# Altium PCB FPv0.13.PcbDoc (part 1 of 2)
Units mm, origin at the board's own origin, x right, y up, seen from the top; angles counter-clockwise.
Board outline 81.28 x 53.34 mm, 4 copper layers (Top Layer, GROUND PLANE, MidLayer1, Bottom Layer); 86 components, 142 nets, 542 pads, 250 vias.
Unrouted connection lines stored in the file: 1.
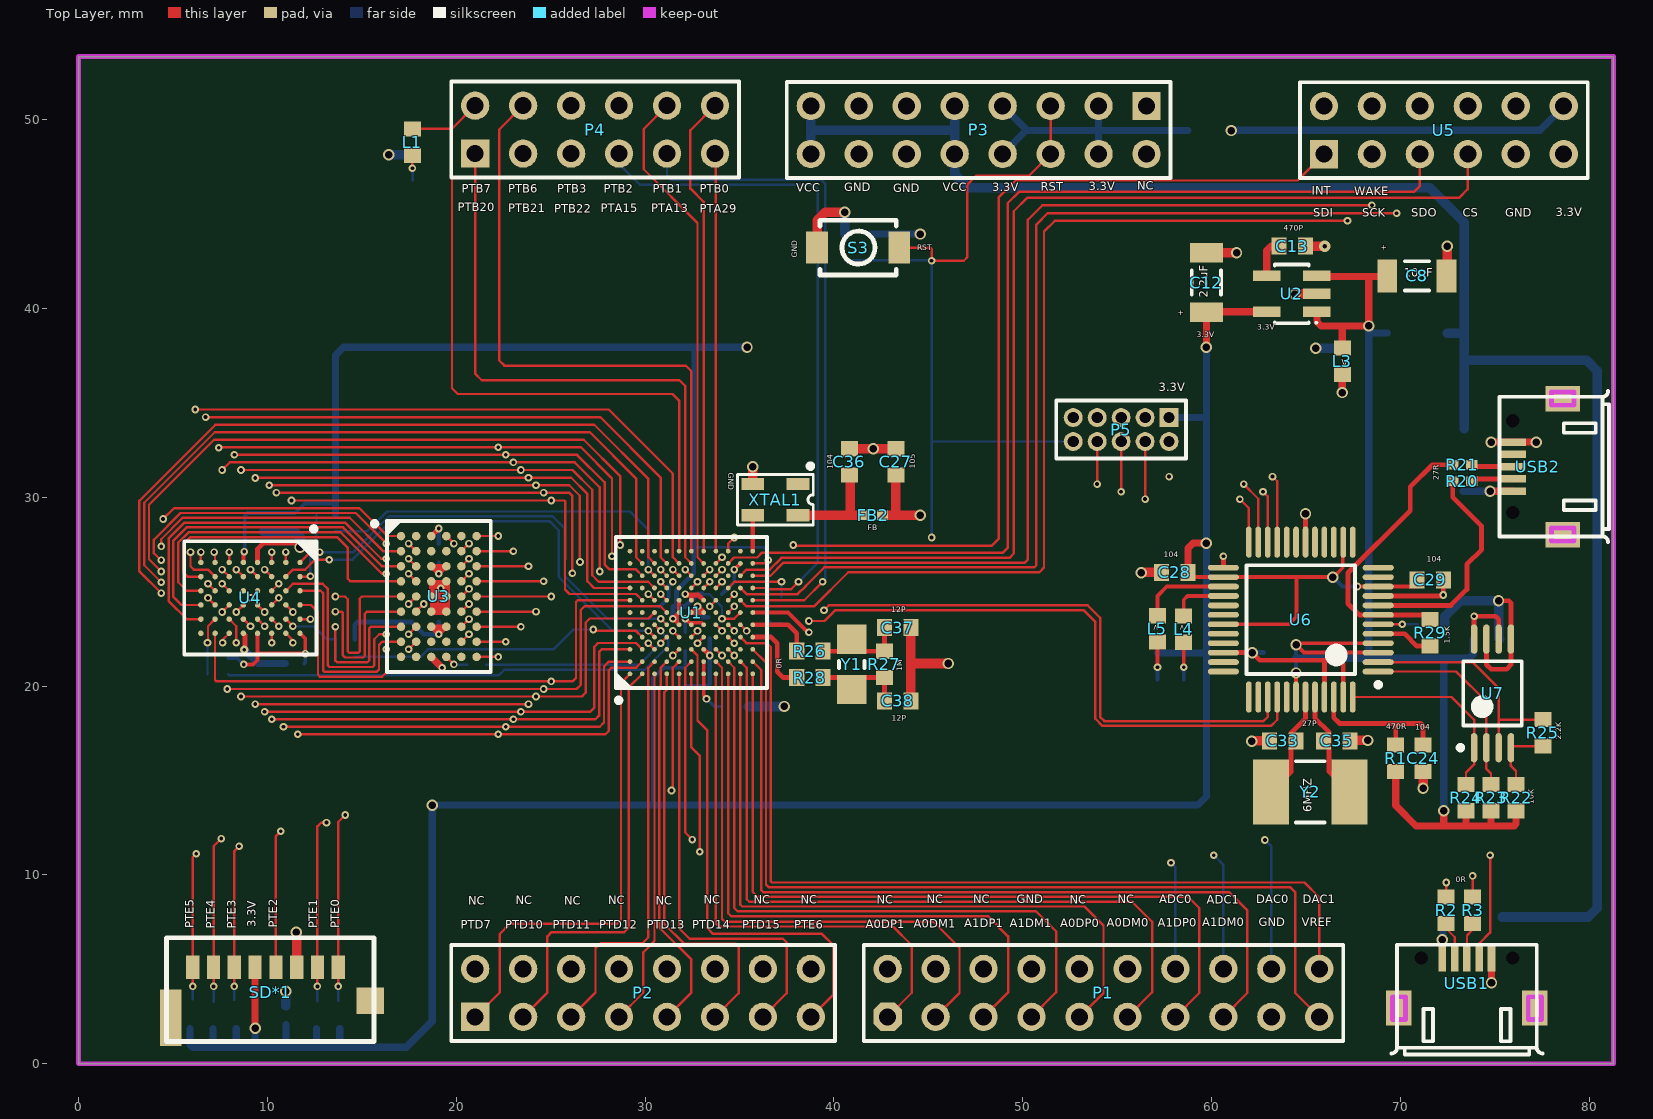
[diagram p0: Top Layer view]
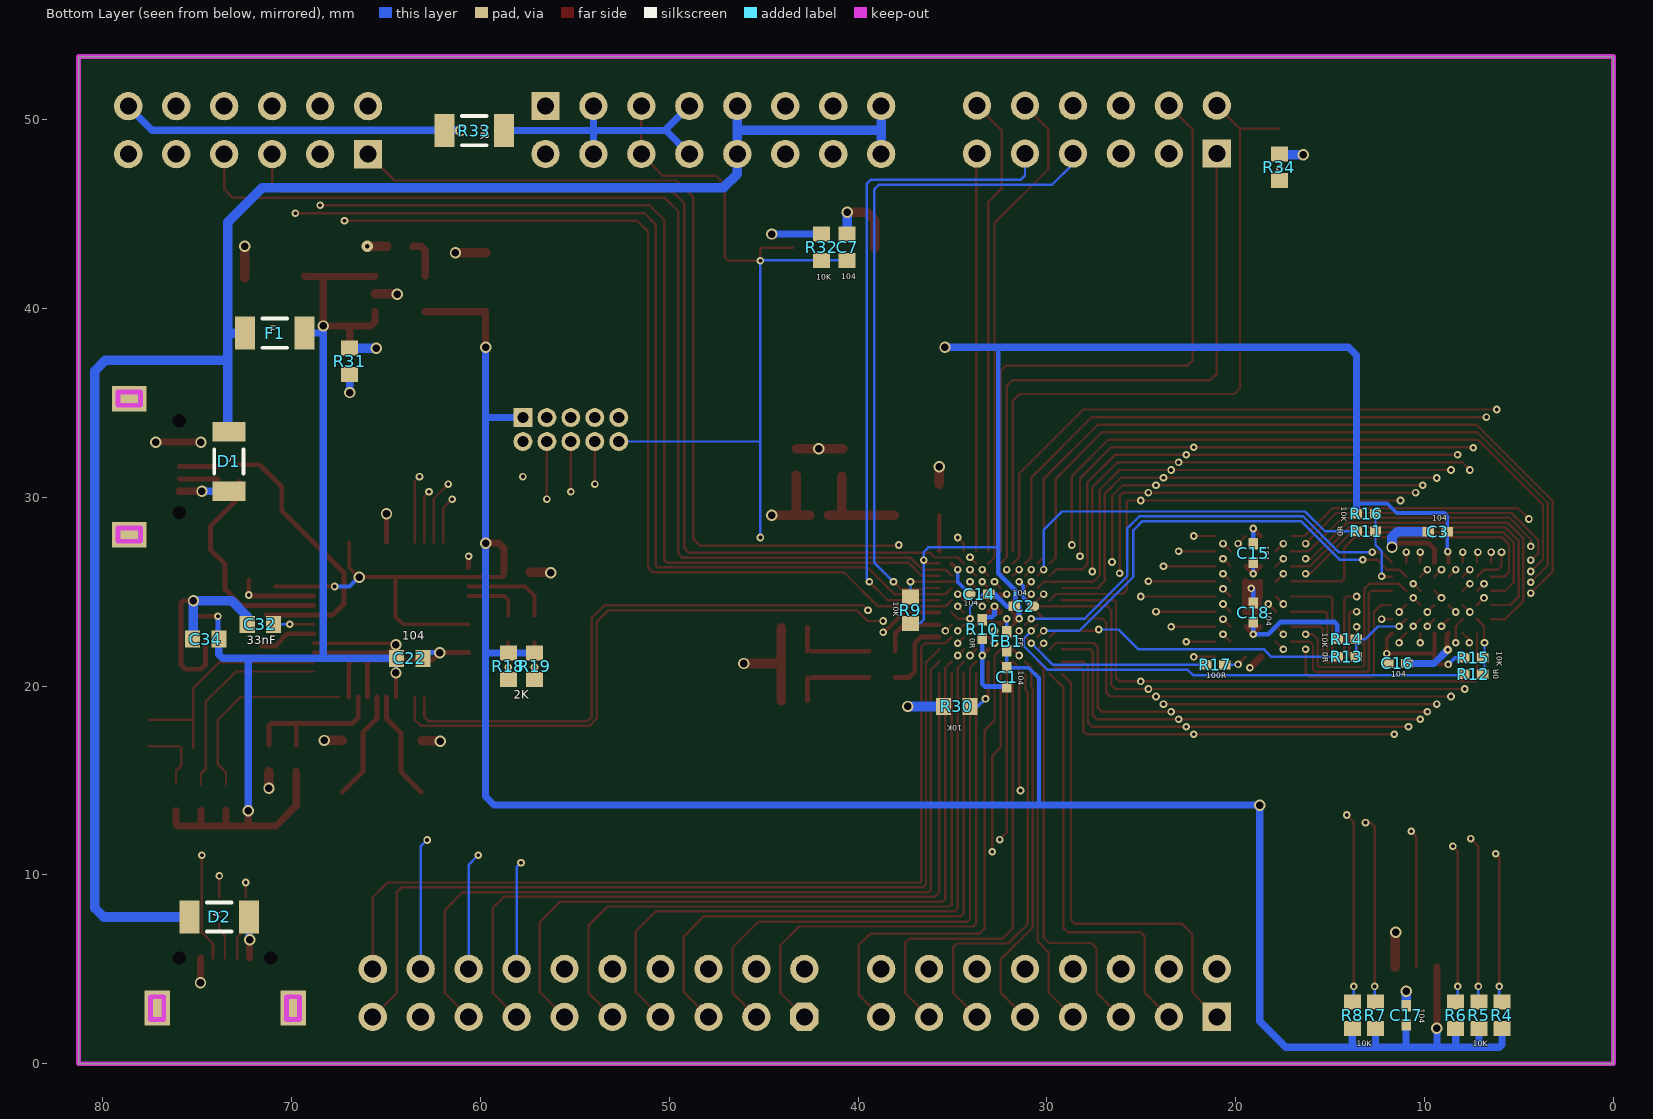
[diagram p1: Bottom Layer view, seen from below]
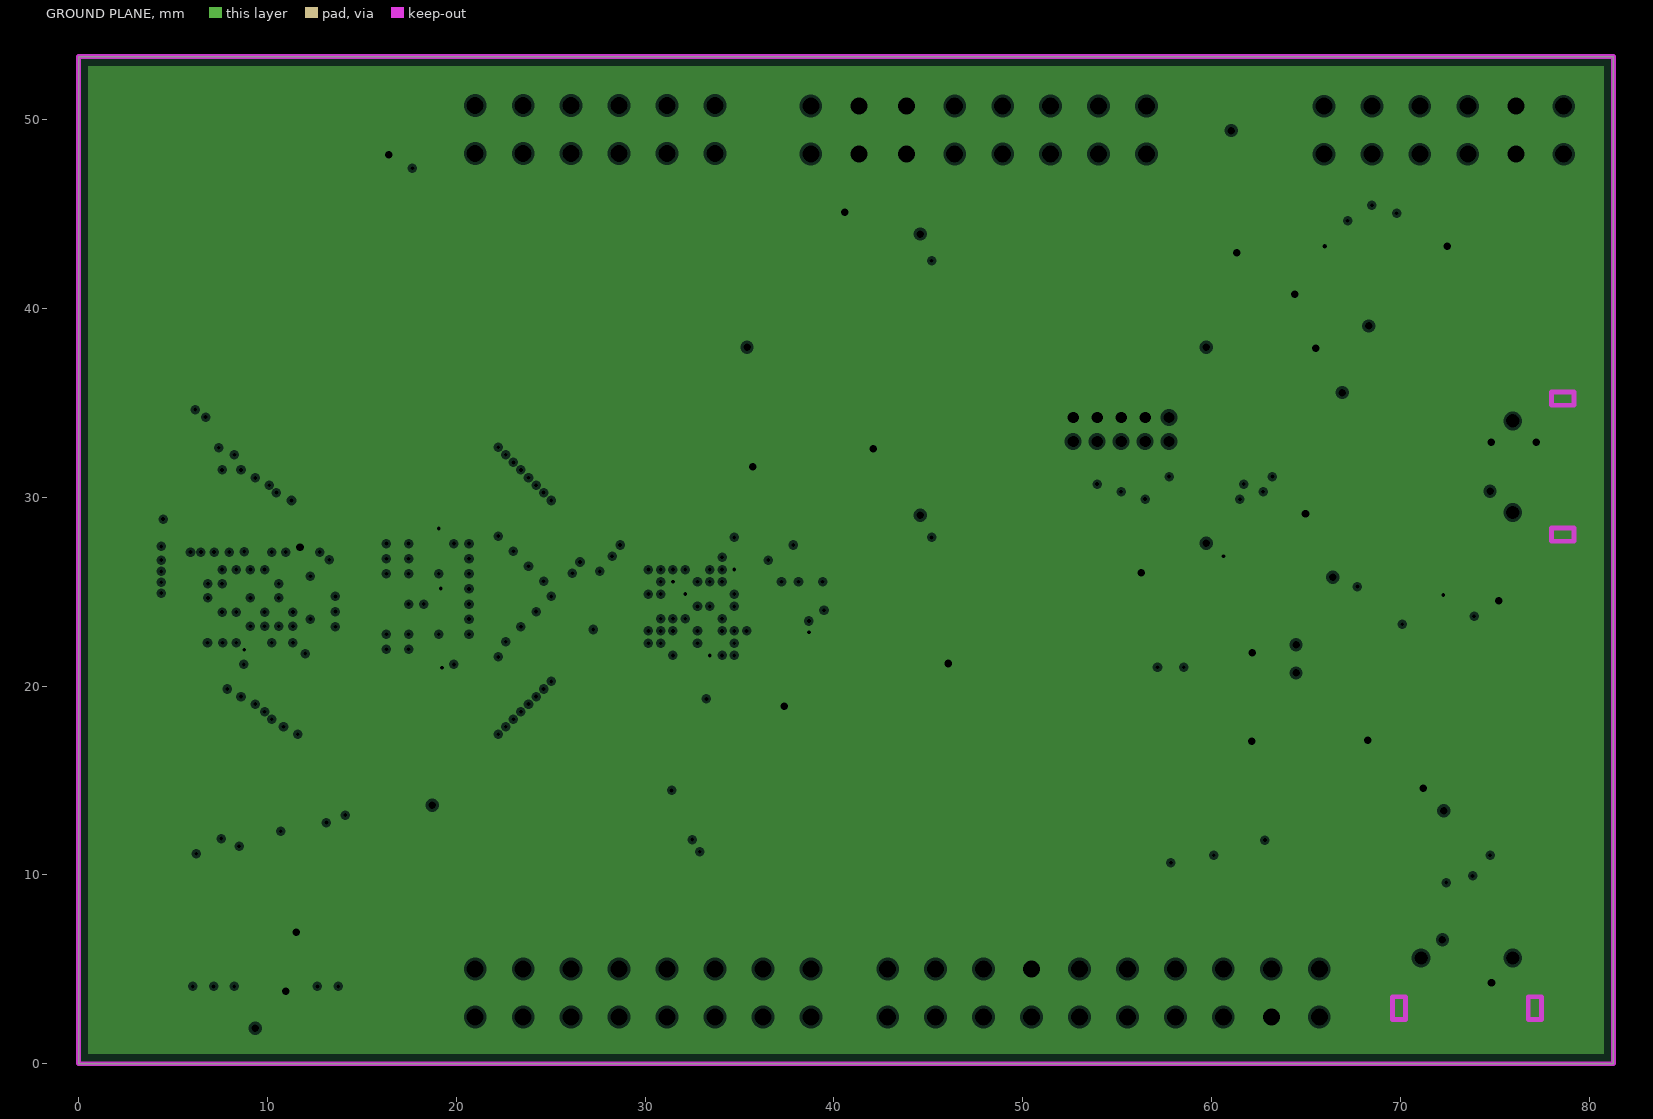
[diagram p2: GROUND PLANE, clearances drawn from the general rule]
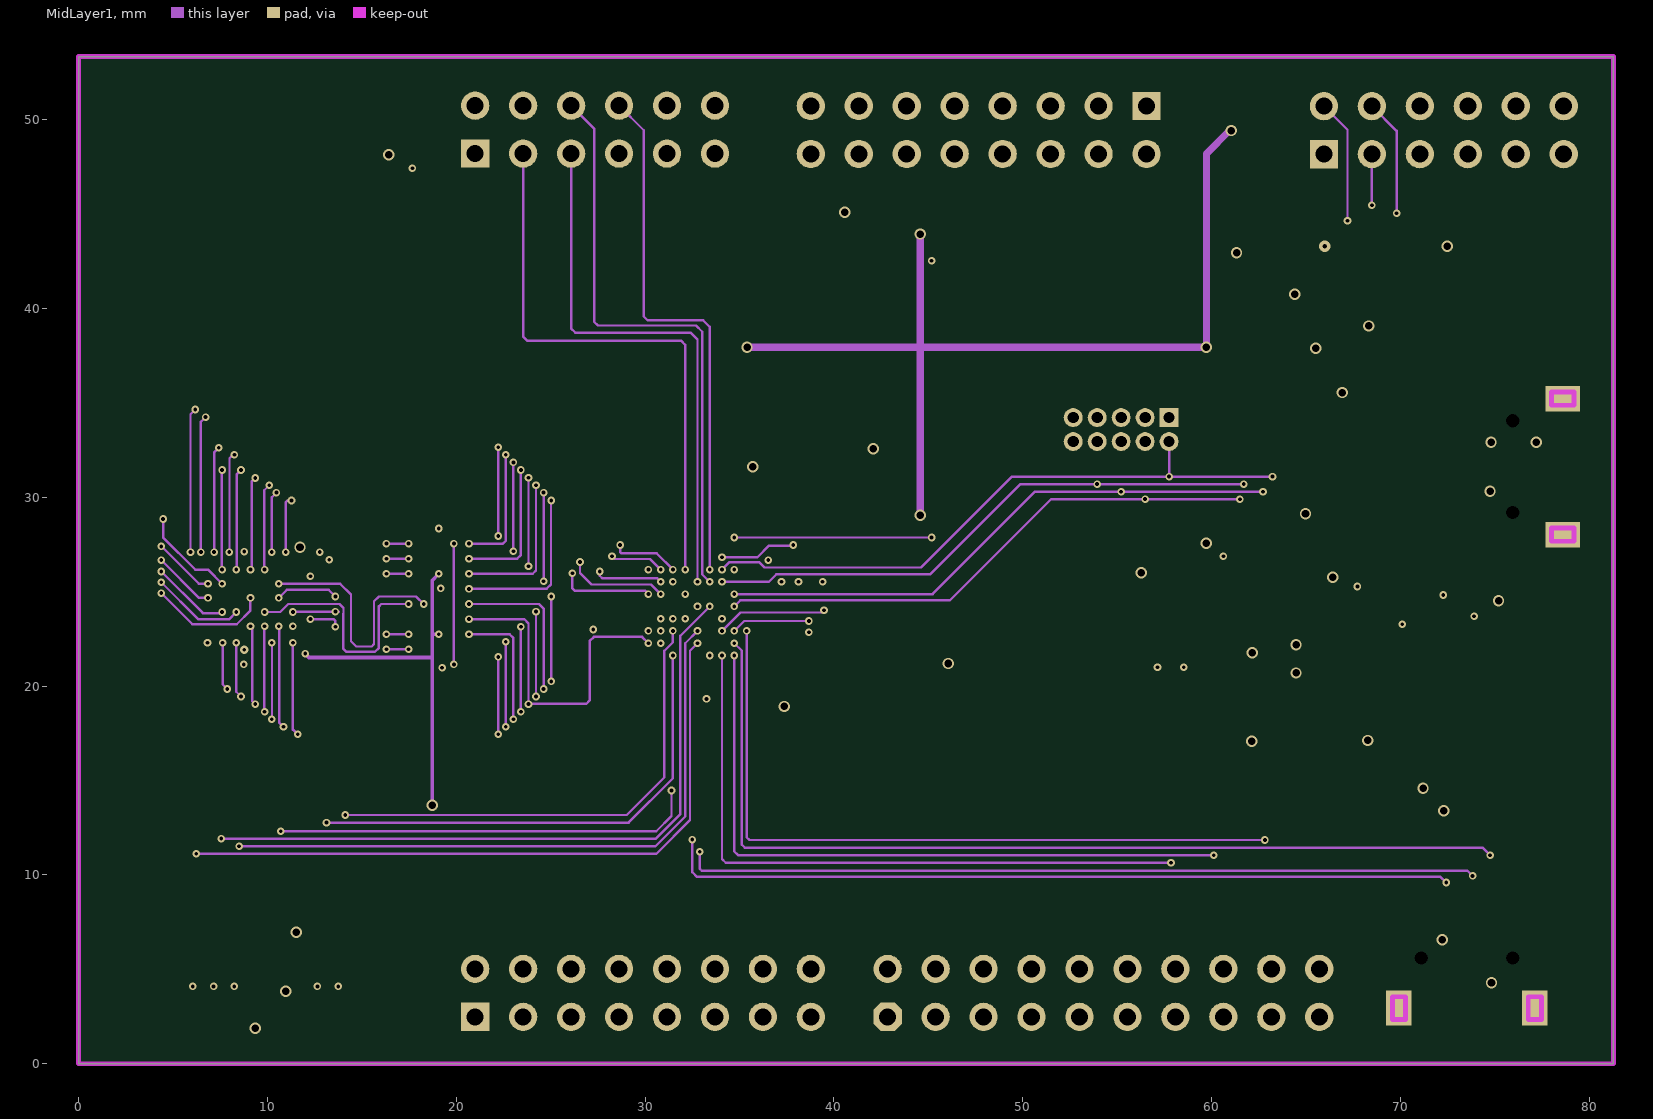
[diagram p3: MidLayer1]

## Layer stack, top to bottom
Top Layer: signal copper 0.0356
Dielectric: prepreg 0.32, FR-4, Dk 4.8
GROUND PLANE: plane copper 0.0356, net GND
Dielectric: core 0.32, FR-4, Dk 4.8
MidLayer1: signal copper 0.0356
Dielectric: prepreg 0.32, FR-4, Dk 4.8
Bottom Layer: signal copper 0.0356

## Board outline
0,0 0,53.34 81.28,53.34 81.28,0

## Design rules (kind name [scope] priority, off if disabled: settings)
Clearance [All] p1: gap=0.127
DiffPairsRouting [All] p1: maxlimit=0.254 minlimit=0.254 mostfreqgap=0.254 maxuncoupledlength=12.7
HoleSize [All] p1: absolutevalues=TRUE maxlimit=2.54 minlimit=0.2 maxpercent=80.000 minpercent=20.000
PlaneClearance [All] p1: clearance=0.152
PlaneConnect [All] p1: planeconnectstyle=Direct reliefexpansion=0.508 reliefentries=4 reliefconductorwidth=0.254 reliefairgap=0.254
PolygonConnect [All] p1: connectstyle=Relief reliefconductorwidth=0.254 reliefentries=4 polygonreliefangle="90 Angle" airgapwidth=0.254
RoutingVias [All] p1: holewidth=0.711 width=1.27 viastyle="Through Hole" minholewidth=0.711 minwidth=1.27 maxholewidth=0.711 maxwidth=1.27
SolderMaskExpansion [All] p1: expansion=0.102
Width [All] p1: maxlimit=1.778 minlimit=0.127 preferedwidth=0.254 minimp=50.000000 maximp=50.000000 favimp=50.000000
24 further rules are at their usual default settings.

## Classes and differential pairs
from-to class SRAM_DATA: "AD0 (U1-B2 : U4-B6)" "AD1 (U1-A2 : U4-C5)" "AD2 (U1-A3 : U4-C6)" "AD3 (U1-B3 : U4-D5)" "AD4 (U1-C3 : U4-E5)" "AD5 (U1-C6 : U4-F5)" "AD6 (U1-D6 : U4-F6)" "AD7 (U1-A7 : U4-G6)" "AD8 (U1-B7 : U4-B1)" "AD9 (U1-C7 : U4-C1)" "AD10 (U1-D7 : U4-C2)" "AD11 (U1-A8 : U4-D2)" "AD12 (U1-C8 : U4-E2)" "AD13 (U1-D8 : U4-F2)" "AD14 (U1-B9 : U4-F1)" "AD15 (U1-D9 : U4-G1)" "AD16 (U1-E9 : U4-F4)" "AD17 (U1-B10 : U4-E4)" "AD18 (U1-C10 : U4-D3)" "AD19 (U1-D10 : U4-H1)" "AD20 (U1-E10 : U4-G2)"
component class MCU_K64FX: C1 C2 C3 C7 C27 C36 C37 C38 FB1 FB2 P5 R4 R5 R6 R7 R8 R9 R10 R26 R27 R28 R30 R32 S3 U1 XTAL1 Y1
component class Memory: C14 C15 C16 C17 C18 R11 R12 R13 R14 R15 R16 R17 U3 U4
component class power_manage: C8 C12 C13 D1 D2 F1 L3 R31 U2
component class protocol1: L1 P1 P2 P3 P4 R2 R3 R33 R34 SD*1 USB1
component class protocol2: C22 C24 C28 C29 C32 C33 C34 C35 L4 L5 R1 R18 R19 R20 R21 R22 R23 R24 R25 R29 U6 U7 USB2 Y2
component class RF_mod: U5
net class AD[20..0]: AD0 AD1 AD2 AD3 AD4 AD5 AD6 AD7 AD8 AD9 AD10 AD11 AD12 AD13 AD14 AD15 AD16 AD17 AD18 AD19 AD20
net class PTE[0..5]: PTE0 PTE1 PTE2 PTE3 PTE4 PTE5 PTE6
differential pair USB0D: +USB0D_P -USB0D_N
differential pair USB1D: +USB1D_P -USB1D_N

## Components (designator, comment, footprint, x,y, rotation, side; value= is the part's Value field where it differs from the comment)
C1 "Cap" 0402#1 32.125,20.475 r90 bottom
C2 "Cap" 0402#2 31.225,24.225 r0 bottom
C3 "Cap" 0402#1 9.3,28.175 r180 bottom
C7 "Cap" 1608[0603] 40.575,43.25 r270 bottom
C8 "Cap Pol1" 1206(2) 70.875,41.725 r0 top
C12 "Cap Pol1" 1206(2) 59.725,41.375 r90 top
C13 "Cap" 1608[0603] 64.275,43.3 r180 top
C14 "Cap Pol1" 0402#3 33.575,24.875 r0 bottom
C15 "Cap" 0402#1 19.075,27.05 r270 bottom
C16 "Cap" 0402#1 11.45,21.2 r0 bottom
C17 "Cap" 0402#1 10.975,2.575 r270 bottom
C18 "Cap" 0402#1 19.075,23.9 r270 bottom
C22 "Cap" 1608[0603] 63.75,21.475 r0 bottom
C24 "Cap" 1608[0603] 71.2,16.175 r270 top
C27 "Cap" 1608[0603] 43.275,31.875 r270 top
C28 "Cap" 1608[0603] 58.05,26.025 r0 top
C29 "Cap" 1608[0603] 71.575,25.625 r180 top
C32 "Cap" 1608[0603] 71.65,23.275 r0 bottom
C33 "Cap" 1608[0603] 63.775,17.1 r0 top
C34 "Cap" 1608[0603] 74.554,22.491 r180 bottom
C35 "Cap" 1608[0603] 66.625,17.1 r0 top
C36 "Cap" 1608[0603] 40.825,31.875 r270 top
C37 "Cap" 1608[0603] 43.375,23.1 r180 top
C38 "Cap" 1608[0603] 43.375,19.225 r180 top
D1 "sk4" 1206(2) 73.325,31.9 r90 bottom
D2 "sk4" 1206(2) 73.825,7.775 r0 bottom
F1 "300-500mA" 1206(2) 70.9,38.7 r180 bottom
FB1 "Inductor" 0402#1 32.125,22.375 r90 bottom
FB2 "Inductor" 0402#1 42.075,29.05 r180 top
L1 "LED" 1608[0603] 17.675,48.8 r270 top
L3 "LED" 1608[0603] 66.925,37.2 r270 top
L4 "LED" 1608[0603] 58.525,23.025 r90 top
L5 "LED" 1608[0603] 57.134,23.029 r90 top
P1 "Header 10X2" HDR2X10 42.845,2.485 r0 top
P2 "Header 8X2" HDR2X8 21.001,2.485 r0 top
P3 "Header 8X2" HDR2X8 56.556,50.725 r180 top
P4 "Header 6X2" HDR2X6 21.001,48.205 r0 top
P5 "JTAG" MHDR2X5 57.75,34.225 r180 top
R1 "Res" 1608[0603] 69.75,16.175 r90 top
R2 "Res" 1608[0603] 72.425,8.125 r270 top
R3 "Res" 1608[0603] 73.825,8.125 r270 top
R4 "Res" 1608[0603] 5.9,2.575 r90 bottom
R5 "Res" 1608[0603] 7.125,2.575 r90 bottom
R6 "Res" 1608[0603] 8.35,2.575 r90 bottom
R7 "Res" 1608[0603] 12.6,2.575 r90 bottom
R8 "Res" 1608[0603] 13.825,2.575 r90 bottom
R9 "Res" 1608[0603] 37.225,24.025 r90 bottom
R10 "Res" 0402#1 33.425,23.025 r90 bottom
R11 "Res" 0402#1 13.1,28.2 r0 bottom
R12 "Res" 0402#1 7.425,20.625 r0 bottom
R13 "Res" 0402#1 14.125,21.55 r0 bottom
R14 "Res" 0402#1 14.125,22.475 r0 bottom
R15 "Res" 0402#1 7.425,21.5 r0 bottom
R16 "Res" 0402#1 13.1,29.125 r0 bottom
R17 "Res" 0402#1 21.075,21.125 r180 bottom
R18 "Res" 1608[0603] 58.525,21.047 r90 bottom
R19 "Res" 1608[0603] 57.134,21.051 r90 bottom
R20 "Res" 0402#1 73.275,30.85 r180 top
R21 "Res" 0402#1 73.275,31.725 r180 top
R22 "Res" 1608[0603] 76.125,14.1 r90 top
R23 "Res" 1608[0603] 74.8,14.1 r90 top
R24 "Res" 1608[0603] 73.475,14.1 r90 top
R25 "Res" 1608[0603] 77.55,17.525 r270 top
R26 "Res" 1608[0603] 38.729,21.852 r180 top
R27 "Res" 1608[0603] 42.675,21.15 r270 top
R28 "Res" 1608[0603] 38.729,20.455 r180 top
R29 "Res" 1608[0603] 71.575,22.825 r270 top
R30 "Res" 1608[0603] 34.775,18.925 r180 bottom
R31 "Res" 1608[0603] 66.925,37.2 r270 bottom
R32 "Res" 1608[0603] 41.936,43.244 r270 bottom
R33 "Res" 1206 60.325,49.425 r0 bottom
R34 "Res" 1608[0603] 17.688,47.488 r270 bottom
S3 "SW-PB" "key 3*4*2" 41.3,43.225 r0 top
SD*1 "TF_card" TF卡座(短体) 4.65,1.175 r0 top
U1 "MK64FX512VDC" BGA121C65P11X11_800X800X50 32.45,23.9 r90 top
U2 "MIC5219" SOT-23-5 64.25,40.775 r90 top
U3 "SN74LVC16373A(BGA54)" BGA54C80P6X9_550X800X120 19.075,24.75 r0 top
U4 "EM7164SU16" BGA48C75P6X8_598X698X104 9.1,24.675 r270 top
U5 "Header 6X2" HDR2X6 65.95,48.175 r0 top
U6 "FT2232D" TSQFP50P900X900X160-48N 64.725,23.525 r180 top
U7 "AT93C46D" TSOP65P640X120-8N-AT93C46D 74.879,19.616 r90 top
USB1 "USB_5line" USB-MICRO-5P-2F#1 72.225,5.6 r180 top
USB2 "USB_5line" USB-MICRO-5P-2F#2 75.95,30.325 r270 top
XTAL1 "50M有源晶体" XTAL7_3225 36.9,29.875 r180 top
Y1 "32.768kHZ" 3215 40.95,21.15 r270 top
Y2 "6MHz" 5032 65.225,14.4 r180 top

## Footprints (in the part's own frame and the unit in brackets; to place one, negate y for a bottom-side part, rotate by r counter-clockwise, add the part's x,y. Pads: shape width x height; smd on the part's side, far side on the other; paste and mask are expansions set on the pad)
0402#1 [mm] "Chip Capacitor, Body 1.0x0.5mm, IPC High Density"
  rect 0.6x0.5 smd: 1(-0.5,0) 2(0.5,0)
  body extent -0.55,-0.3 0.55,0.3, height 1.3
0402#2 [mm] "Chip Capacitor, Body 1.0x0.5mm, IPC High Density"
  oct 0.6x0.5 smd: 1(-0.5,0)
  rect 0.6x0.5 smd: 2(0.5,0)
  body extent -0.55,-0.3 0.55,0.3, height 1.3
0402#3 [mm] "Chip Capacitor, Body 1.0x0.5mm, IPC High Density"
  rect 0.6x0.5 smd: 1(-0.5,0)
  oval 0.6x0.5 smd mask+0.051: 2(0.5,0)
  body extent -0.55,-0.3 0.55,0.3, height 1.3
1206 [mm]
  rect 1.05x1.75 smd: 1(-1.575,0) 2(1.575,0)
  silkscreen extent -0.65,-0.77 0.65,0.77, body extent -1.6,-0.8 1.6,0.8, height 1.6
1206(2) [mm]
  rect 1.05x1.75 smd: 1(-1.575,0) 2(1.575,0)
  silkscreen extent -0.65,-0.77 0.65,0.77, body extent -1.6,-0.8 1.6,0.8, height 1.6
1608[0603] [mm] "Chip Capacitor, Body 1.6x0.8mm, IPC High Density"
  rect 0.8x0.9 smd: 1(-0.7,0) 2(0.7,0)
  body extent -0.87,-0.48 0.87,0.48, height 1.3
3215 [mm]
  rect 1.54x1.55 smd: 1(-1.335,0) 2(1.335,0)
  silkscreen extent -0.2,-0.67 0.2,0.67, body extent -1.65,-0.75 1.65,0.75, height 0.75
5032 [mm]
  rect 1.9x3.45 smd: 1(-2.075,0) 2(2.075,0)
  silkscreen extent -0.75,-1.63 0.75,1.63, body extent -2.6,-1.7 2.6,1.7, height 1.3
BGA48C75P6X8_598X698X104 [mm] "BGA, 48-Leads, Body 5.98x6.98mmx1.04mm, Pitch 0.75mm"
  round 0.29 smd: A1(-1.875,2.625) A2(-1.125,2.625) A3(-0.375,2.625) A4(0.375,2.625) A5(1.125,2.625) A6(1.875,2.625) B1(-1.875,1.875) B2(-1.125,1.875) B3(-0.375,1.875) B4(0.375,1.875) B5(1.125,1.875) B6(1.875,1.875) C1(-1.875,1.125) C2(-1.125,1.125) C3(-0.375,1.125) C4(0.375,1.125) C5(1.125,1.125) C6(1.875,1.125) D1(-1.875,0.375) D2(-1.125,0.375) D3(-0.375,0.375) D4(0.375,0.375) D5(1.125,0.375) D6(1.875,0.375) E1(-1.875,-0.375) E2(-1.125,-0.375) E3(-0.375,-0.375) E4(0.375,-0.375) E5(1.125,-0.375) E6(1.875,-0.375) F1(-1.875,-1.125) F2(-1.125,-1.125) F3(-0.375,-1.125) F4(0.375,-1.125) F5(1.125,-1.125) F6(1.875,-1.125) G1(-1.875,-1.875) G2(-1.125,-1.875) G3(-0.375,-1.875) G4(0.375,-1.875) G5(1.125,-1.875) G6(1.875,-1.875) H1(-1.875,-2.625) H2(-1.125,-2.625) H3(-0.375,-2.625) H4(0.375,-2.625) H5(1.125,-2.625) H6(1.875,-2.625)
  silkscreen extent -3.77,-3.5 3,3.5, body extent -2.99,-3.49 2.99,3.49, height 1.04
BGA54C80P6X9_550X800X120 [mm] "BGA, 54-Leads, Body 5.50x8.00mmx1.20mm, Pitch 0.80mm"
  round 0.45 smd: A1(-2,3.2) A2(-1.2,3.2) A3(-0.4,3.2) A4(0.4,3.2) A5(1.2,3.2) A6(2,3.2) B1(-2,2.4) B2(-1.2,2.4) B3(-0.4,2.4) B4(0.4,2.4) B5(1.2,2.4) B6(2,2.4) C1(-2,1.6) C2(-1.2,1.6) C3(-0.4,1.6) C4(0.4,1.6) C5(1.2,1.6) C6(2,1.6) D1(-2,0.8) D2(-1.2,0.8) D3(-0.4,0.8) D4(0.4,0.8) D5(1.2,0.8) D6(2,0.8) E1(-2,0) E2(-1.2,0) E3(-0.4,0) E4(0.4,0) E5(1.2,0) E6(2,0) F1(-2,-0.8) F2(-1.2,-0.8) F3(-0.4,-0.8) F4(0.4,-0.8) F5(1.2,-0.8) F6(2,-0.8) G1(-2,-1.6) G2(-1.2,-1.6) G3(-0.4,-1.6) G4(0.4,-1.6) G5(1.2,-1.6) G6(2,-1.6) H1(-2,-2.4) H2(-1.2,-2.4) H3(-0.4,-2.4) H4(0.4,-2.4) H5(1.2,-2.4) H6(2,-2.4) J1(-2,-3.2) J2(-1.2,-3.2) J3(-0.4,-3.2) J4(0.4,-3.2) J5(1.2,-3.2) J6(2,-3.2)
  silkscreen extent -3.52,-4 2.75,4, body extent -2.75,-4 2.75,4, height 1.2
BGA121C65P11X11_800X800X50 [mm] "BGA, 121-Leads, Body 8.00x8.00mmx0.50mm, Pitch 0.65mm"
  round 0.25 smd: A1(-3.25,3.25) A2(-2.6,3.25) A3(-1.95,3.25) A4(-1.3,3.25) A5(-0.65,3.25) A6(0,3.25) A7(0.65,3.25) A8(1.3,3.25) A9(1.95,3.25) A10(2.6,3.25) A11(3.25,3.25) B1(-3.25,2.6) B2(-2.6,2.6) B3(-1.95,2.6) B4(-1.3,2.6) B5(-0.65,2.6) B6(0,2.6) B7(0.65,2.6) B8(1.3,2.6) B9(1.95,2.6) B10(2.6,2.6) B11(3.25,2.6) C1(-3.25,1.95) C2(-2.6,1.95) C3(-1.95,1.95) C4(-1.3,1.95) C5(-0.65,1.95) C6(0,1.95) C7(0.65,1.95) C8(1.3,1.95) C9(1.95,1.95) C10(2.6,1.95) C11(3.25,1.95) D1(-3.25,1.3) D2(-2.6,1.3) D3(-1.95,1.3) D4(-1.3,1.3) D5(-0.65,1.3) D6(0,1.3) D7(0.65,1.3) D8(1.3,1.3) D9(1.95,1.3) D10(2.6,1.3) D11(3.25,1.3) E1(-3.25,0.65) E2(-2.6,0.65) E3(-1.95,0.65) E4(-1.3,0.65) E5(-0.65,0.65) E6(0,0.65) E7(0.65,0.65) E8(1.3,0.65) E9(1.95,0.65) E10(2.6,0.65) E11(3.25,0.65) F1(-3.25,0) F2(-2.6,0) F3(-1.95,0) F4(-1.3,0) F5(-0.65,0) F6(0,0) F7(0.65,0) F8(1.3,0) F9(1.95,0) F10(2.6,0) F11(3.25,0) G1(-3.25,-0.65) G2(-2.6,-0.65) G3(-1.95,-0.65) G4(-1.3,-0.65) G5(-0.65,-0.65) G6(0,-0.65) G7(0.65,-0.65) G8(1.3,-0.65) G9(1.95,-0.65) G10(2.6,-0.65) G11(3.25,-0.65) H1(-3.25,-1.3) H2(-2.6,-1.3) H3(-1.95,-1.3) H4(-1.3,-1.3) H5(-0.65,-1.3) H6(0,-1.3) H7(0.65,-1.3) H8(1.3,-1.3) H9(1.95,-1.3) H10(2.6,-1.3) H11(3.25,-1.3) J1(-3.25,-1.95) J2(-2.6,-1.95) J3(-1.95,-1.95) J4(-1.3,-1.95) J5(-0.65,-1.95) J6(0,-1.95) J7(0.65,-1.95) J8(1.3,-1.95) J9(1.95,-1.95) J10(2.6,-1.95) J11(3.25,-1.95) K1(-3.25,-2.6) K2(-2.6,-2.6) K3(-1.95,-2.6) K4(-1.3,-2.6) K5(-0.65,-2.6) K6(0,-2.6) K7(0.65,-2.6) K8(1.3,-2.6) K9(1.95,-2.6) K10(2.6,-2.6) K11(3.25,-2.6) L1(-3.25,-3.25) L2(-2.6,-3.25) L3(-1.95,-3.25) L4(-1.3,-3.25) L5(-0.65,-3.25) L6(0,-3.25) L7(0.65,-3.25) L8(1.3,-3.25) L9(1.95,-3.25) L10(2.6,-3.25) L11(3.25,-3.25)
  silkscreen extent -4.77,-4 4,4, body extent -4,-4 4,4, height 0.5
HDR2X6 [mm] "Connector; Header; 6x2 Position"
  rect 1.5x1.5 hole 0.9: 1(0,0)
  round 1.5 hole 0.9: 2(0,2.54) 3(2.54,0) 4(2.54,2.54) 5(5.08,0) 6(5.08,2.54) 7(7.62,0) 8(7.62,2.54) 9(10.16,0) 10(10.16,2.54) 11(12.7,0) 12(12.7,2.54)
  silkscreen extent -1.27,-1.27 13.97,3.81, body extent -1.27,-1.27 13.97,3.81, height 7.58
HDR2X8 [mm] "Connector; Header; 8x2 Position"
  rect 1.5x1.5 hole 0.9: 1(0,0)
  round 1.5 hole 0.9: 2(0,2.54) 3(2.54,0) 4(2.54,2.54) 5(5.08,0) 6(5.08,2.54) 7(7.62,0) 8(7.62,2.54) 9(10.16,0) 10(10.16,2.54) 11(12.7,0) 12(12.7,2.54) 13(15.24,0) 14(15.24,2.54) 15(17.78,0) 16(17.78,2.54)
  silkscreen extent -1.27,-1.27 19.05,3.81, body extent -1.27,-1.27 19.05,3.81, height 7.58
HDR2X10 [mm] "Connector; Header; 10x2 Position"
  oct 1.5x1.5 hole 0.9: 1(0,0)
  round 1.5 hole 0.9: 2(0,2.54) 3(2.54,0) 4(2.54,2.54) 5(5.08,0) 6(5.08,2.54) 7(7.62,0) 8(7.62,2.54) 9(10.16,0) 10(10.16,2.54) 11(12.7,0) 12(12.7,2.54) 13(15.24,0) 14(15.24,2.54) 15(17.78,0) 16(17.78,2.54) 17(20.32,0) 18(20.32,2.54) 19(22.86,0) 20(22.86,2.54)
  silkscreen extent -1.27,-1.27 24.13,3.81, body extent -1.27,-1.27 24.13,3.81, height 7.58
"key 3*4*2" [mm]
  rect 1.15x1.7 smd: 1(-2.191,0) 2(2.159,0)
  silkscreen extent -2.03,-1.45 2,1.45
MHDR2X5 [mm] "Connector; Header; 5x2 Position"
  rect 1x1 hole 0.6: 1(0,0)
  round 1 hole 0.6: 2(0,1.27) 3(1.27,0) 4(1.27,1.27) 5(2.54,0) 6(2.54,1.27) 7(3.81,0) 8(3.81,1.27) 9(5.08,0) 10(5.08,1.27)
  silkscreen extent -0.9,-0.9 5.98,2.17
SOT-23-5 [mm] "SOT-23/SC-74A; 5 Leads; Body 3.1 x 3 mm, inc. leads (LxW max)"
  rect 0.55x1.45 smd: 1(-0.95,-1.329) 2(0,-1.329) 3(0.95,-1.329) 4(0.95,1.329) 5(-0.95,1.329)
  silkscreen extent -1.57,-1.35 1.55,0.9
TF卡座(短体) [mm]
  rect 1.15x3 smd: 0(0.227,1.27)
  rect 1.48x1.4 smd: 0(10.795,2.159)
  rect 0.7x1.25 smd: 1(1.397,3.937) 2(2.497,3.937) 3(3.597,3.937) 4(4.697,3.937) 5(5.797,3.937) 6(6.897,3.937) 7(7.997,3.937) 8(9.097,3.937)
  silkscreen extent 0,0 11,5.5
TSOP65P640X120-8N-AT93C46D [mm] "TSOP, 8-Leads, Body 3.00x4.40mm, Pitch 0.65mm, IPC Medium Density"
  oval 1.55x0.35 smd: 1(-2.875,0.975) 2(-2.875,0.325) 3(-2.875,-0.325) 4(-2.875,-0.975) 5(2.875,-0.975) 6(2.875,-0.325) 7(2.875,0.325) 8(2.875,0.975)
  silkscreen extent -3,-1.55 1.7,1.82, body extent -2.25,-1.55 2.25,1.55, height 1.2
TSQFP50P900X900X160-48N [mm] "TSQFP, 48-Leads,FTDI FT2232D"
  oval 1.65x0.3 smd: 1(-4.1,2.75) 2(-4.1,2.25) 3(-4.1,1.75) 4(-4.1,1.25) 5(-4.1,0.75) 6(-4.1,0.25) 7(-4.1,-0.25) 8(-4.1,-0.75) 9(-4.1,-1.25) 10(-4.1,-1.75) 11(-4.1,-2.25) 12(-4.1,-2.75) 25(4.1,-2.75) 26(4.1,-2.25) 27(4.1,-1.75) 28(4.1,-1.25) 29(4.1,-0.75) 30(4.1,-0.25) 31(4.1,0.25) 32(4.1,0.75) 33(4.1,1.25) 34(4.1,1.75) 35(4.1,2.25) 36(4.1,2.75)
  oval 0.3x1.65 smd: 13(-2.75,-4.1) 14(-2.25,-4.1) 15(-1.75,-4.1) 16(-1.25,-4.1) 17(-0.75,-4.1) 18(-0.25,-4.1) 19(0.25,-4.1) 20(0.75,-4.1) 21(1.25,-4.1) 22(1.75,-4.1) 23(2.25,-4.1) 24(2.75,-4.1) 37(2.75,4.1) 38(2.25,4.1) 39(1.75,4.1) 40(1.25,4.1) 41(0.75,4.1) 42(0.25,4.1) 43(-0.25,4.1) 44(-0.75,4.1) 45(-1.25,4.1) 46(-1.75,4.1) 47(-2.25,4.1) 48(-2.75,4.1)
  silkscreen extent -4.23,-2.88 2.88,3.57, body extent -3.5,-3.5 3.5,3.5, height 1.6
USB-MICRO-5P-2F#1 [mm]
  round 0 hole 0.7: 0(-3.725,0) 0(1.125,0)
  rect 0.4x1.4 smd: 1(0,0) 2(-0.65,0) 3(-1.3,0) 4(-1.95,0) 5(-2.6,0)
  rect 1.35x1.85 all layers, no hole: 6(2.3,2.65) 7(-4.9,2.65)
  Keep-Out Layer lines w0.254: 2.65,3.25 2.65,2.05 1.95,2.05 1.95,3.25 2.65,3.25 ; -4.55,3.25 -5.25,3.25 -5.25,2.05 -4.55,2.05 -4.55,3.25
  silkscreen extent -5.3,-0.7 2.7,5.1
USB-MICRO-5P-2F#2 [mm]
  round 0 hole 0.7 mask+0.051: 0(-3.725,0) 0(1.125,0)
  rect 0.4x1.4 smd: 1(0,0) 2(-0.65,0) 3(-1.3,0) 4(-1.95,0) 5(-2.6,0)
  rect 1.35x1.85 all layers, no hole: 6(2.3,2.65) 7(-4.9,2.65)
  Keep-Out Layer lines w0.254: 2.65,2.05 2.65,3.25 1.95,3.25 1.95,2.05 2.65,2.05 ; -4.55,2.05 -5.25,2.05 -5.25,3.25 -4.55,3.25 -4.55,2.05
  silkscreen extent -5.3,-0.7 2.7,5.1
XTAL7_3225 [mil]
  rect 47.2x25.6 smd: 1(-47.25,-32.5) 2(47.25,-32.5) 3(47.25,32.5) 4(-47.25,32.5)
  silkscreen extent -79,-75 79,53

## Part data
C1 C2 C3 C7 C13 C15 C16 C17 C18 C22 C24 C27 C28 C29 C32 C33 C34 C35 C36 C37 C38: "贴片电容"
C8 C12 C14: "Polarized Capacitor (Radial)"
D1 D2: library part "Diode 1N4001", "1 Amp General Purpose Rectifier"
F1: library part "Fuse 1", "Fuse"
P1: "Header, 10-Pin, Dual row"
P2 P3: "Header, 8-Pin, Dual row"
P4 U5: "Header, 6-Pin, Dual row"
P5: library part "Header 5X2", "Header, 5-Pin, Dual row"
R1 R2 R3 R4 R5 R6 R7 R8 R9 R10 R11 R12 R13 R14 R15 R16 R17 R18 R19 R20 R21 R22 R23 R24 R25 R26 R27 R28 R29 R30 R31 R32 R33 R34: "贴片电阻"
S3: "Switch"
U2: "LDO"
XTAL1: library part 有源晶体
Y1 Y2: library part XTAL, "晶体振荡器"

## Via types
v1: diameter 0.403, hole 0.2, Top Layer to Bottom Layer, tented both sides, 209 vias
v2: diameter 0.6, hole 0.4, Top Layer to Bottom Layer, tented both sides, 39 vias
v3: diameter 0.6, hole 0.24, Top Layer to Bottom Layer, tented both sides, 1 vias
v4: diameter 0.453, hole 0.2, Top Layer to Bottom Layer, tented both sides, 1 vias

## Nets (pads, with @x,y where several pads share a name; then routed paths per layer and width w, separated by ;. In a path a pad name is that pad's centre, name@x,y a point inside that pad or via, vN(x,y) a via of type N, cw(c..) or ccw(c..) an arc to the next point about the centre after c; other vN are vias at no path point)
3.3V: C1.2 C2.2 C3.2 C12.1 C14.1 C15.2 C16.2 C17.2 C18.2 C27.2 C28.2 C29.2 FB1.1 FB2.1 P5.1 R4.1 R5.1 R6.1 R7.1 R8.1 R9.1 R14.2 R15.2 R16.2 R18.2 R19.2 R32.1 R33.2 SD*1.4 U1.E5 U1.E6 U1.E7 U1.K6 U1.L10 U2.5 U3.C3 U3.C4 U3.G3 U3.G4 U4.A6 U4.D6 U4.E1 U5.11 U5.12 U6.10 U6.14 U6.26 U6.31 | length 325.6
  Top Layer w0.127: v1(34.075,23.575) 34.725,23.575 U1.K6@35.05,23.9 ; U1.L10@35.7,26.5 36.425,26.5 v1@36.6,26.675
  Top Layer w0.203: U4.E1@8.725,26.55 v1@8.725,27.075 ; v1(8.75,21.15) 9.25,21.15 9.475,21.375 9.475,21.725 ; U4.D6@9.475,22.8 9.475,21.725 ; U4.A6@11.725,22.8 12,22.525 v1(12,21.725) 9.475,21.725 ; v1(31.475,23.575) 31.695,23.795 ; v1(31.475,23.575) 31.695,23.355 ; U1.E5@31.8,23.25 31.695,23.355 ; U1.E7@31.8,24.55 U1.E6@31.8,23.9 31.695,23.795 ; C28.2@58.75,25.775 U6.26@60.625,25.775 64.5,25.775 ; U6.31@60.625,23.275 64.1,23.275 64.5,23.675 64.5,25.775 ; U6.14@66.975,27.625 66.944,27.594 66.944,26.269 66.45,25.775 64.5,25.775 ; v1(67.725,25.275) U6.10@68.825,25.275 C29.2@70.85,25.275 ; 31.695,23.355 31.695,23.795
  Top Layer w0.254: v1@8.725,27.075 v1(8.775,27.125) ; U3.G3@18.675,23.15 U3.G3@18.7,23.15 ; U3.G3@18.7,23.175 U3.G3@18.7,23.15 ; 19.075,26.35 v1@19.075,25.95 ; U3.G3@18.7,23.15 18.7,23.125 v1(19.075,22.75) ; U3.G3@18.7,23.15 19.075,23.15 ; v1(19.075,22.75) 19.075,23.15 ; v1(19.075,22.75) U3.G4@19.475,23.15 19.075,23.15 ; v1@19.075,25.95 U3.C4@19.475,26.35 U3.C3@18.675,26.35 v1@19.075,25.95
  Top Layer w0.381: v2(9.347,1.878) SD*1.4@9.347,5.112 ; C28.2@58.75,26.025 58.75,27.3 59.025,27.575 v2(59.725,27.575) ; v2(59.725,37.95) C12.1@59.725,39.8 59.75,39.825 U2.5@62.921,39.825
  Top Layer w0.508: FB2.1@42.575,29.05 43.275,29.05 ; C27.2@43.275,31.175 43.275,29.05 ; v2(44.575,29.05) 43.275,29.05
  MidLayer1 w0.203: v1(12,21.725) 12.205,21.52 18.725,21.52 ; v2@18.725,13.85 18.725,21.52 ; v1(19.075,22.75) 18.725,22.75 ; v1(19.075,25.95) 18.725,25.6 18.725,22.75 ; 18.725,21.52 18.725,22.75
  MidLayer1 w0.381: v2(35.4,37.95) 44.575,37.95 ; 44.569,37.931 v2@44.569,43.925 ; v2(44.575,29.05) 44.575,37.95 ; v2(61.05,49.425) 60.95,49.425 59.725,48.2 v2(59.725,37.95) 44.575,37.95
  Bottom Layer w0.127: 32.581,27.35 36.275,27.35 36.525,27.1 v1(36.525,26.675) 36.525,23.525 36.725,23.325 R9.1@37.225,23.325 ; C14.1@33.075,24.875 33.4,24.875 34.075,24.2 v1(34.075,23.575)
  Bottom Layer w0.203: R15.2@7.925,21.5 8.4,21.5 v1(8.75,21.15) ; v1@8.8,27.15 C3.2@8.8,28.175 8.8,29.025 8.95,29.175 11.475,29.175 11.975,29.675 13.6,29.675 ; C16.2@11.95,21.2 12,21.25 v1(12,21.725) ; v1@19.075,26.125 C15.2@19.075,26.55 ; 30.425,13.7 30.425,20.425 30.975,20.975 C1.2@32.125,20.975 FB1.1@32.125,21.875 ; v2(66.425,25.775) 66.925,25.275 v1(67.725,25.275)
  Bottom Layer w0.254: R14.2@14.625,22.475 14.625,23.25 14.775,23.4 17.625,23.4 18.275,22.75 v1(19.075,22.75) C18.2@19.075,23.4 ; v1(31.475,23.575) 31.475,24.225 32.125,24.225 32.775,24.875 C14.1@33.025,24.875 ; C2.2@31.725,24.225 31.669,24.281 31.669,25.075 32.581,25.986 32.581,27.35 32.581,37.95
  Bottom Layer w0.381: R4.1@5.9,1.875 5.9,1 6.025,0.875 17.35,0.875 18.725,2.25 v2(18.725,13.7) 30.425,13.7 59.275,13.7 59.725,14.15 v2(59.725,27.575) v2(59.725,37.95) ; 7.125,0.925 R5.1@7.125,1.875 ; 8.35,0.925 R6.1@8.35,1.875 ; 9.347,0.878 v2(9.347,1.878) ; 10.975,0.9 C17.2@10.975,2.075 ; 12.6,0.9 R7.1@12.6,1.875 ; R16.2@13.6,29.125 13.6,29.675 13.6,37.525 14.025,37.95 32.581,37.95 v2(35.4,37.95) ; 13.825,0.875 R8.1@13.825,1.875 ; R32.1@41.936,43.944 v2(44.575,43.944) ; R19.2@57.134,21.751 59.674,21.751 ; P5.1@57.75,34.225 59.625,34.225 ; v2@61.05,49.443 77.398,49.443 U5.12@78.87,50.915
3.3V_0R: P3.3 P3.4 P3.7 P3.8 R33.1 | length 14.7
  Bottom Layer w0.381: P3.8@48.936,48.185 50.176,49.425 50.236,49.425 ; P3.7@48.936,50.725 50.236,49.425 ; P3.4@54.016,48.185 54.016,49.425 ; P3.3@54.016,50.725 54.016,49.425 ; R33.1@58.75,49.425 54.016,49.425 ; 50.236,49.425 54.016,49.425
5V: C8.1 C22.2 C34.2 F1.2 L3.1 R1.1 R22.1 R23.1 R24.1 U2.1 U2.3 U6.3 U6.4 U6.42 U7.6 U7.8 | length 76.1
  Top Layer w0.203: U6.42@64.475,19.425 v2(64.475,20.7) ; U6.3@68.825,21.775 64.9,21.775 v2(64.475,22.2) 64.55,22.275 U6.4@68.825,22.275
  Top Layer w0.254: U7.8@73.904,22.491 v1(73.904,23.704) 75.046,23.704 75.204,23.546 U7.6@75.204,22.491
  Top Layer w0.381: U2.1@65.579,39.825 65.579,39.296 65.8,39.075 v2(68.325,39.075) 68.325,41.7 ; U2.3@65.579,41.725 65.604,41.7 68.325,41.7 ; L3.1@66.925,37.9 66.925,39.05 ; C8.1@69.3,41.725 69.275,41.7 68.325,41.7 ; R1.1@69.75,15.475 69.75,13.675 70.825,12.6 76.025,12.6 76.125,12.7 R22.1@76.125,13.4 ; 72.3,12.625 v2(72.3,13.4) ; 73.475,12.625 R24.1@73.475,13.4 ; 74.8,12.65 R23.1@74.8,13.4
  Bottom Layer w0.203: v2(64.475,20.7) C22.2@64.475,21.45 ; C22.2@64.475,21.5 v2(64.475,22.2)
  Bottom Layer w0.254: C34.2@73.904,22.541 v1(73.904,23.704)
  Bottom Layer w0.381: C22.2@64.45,21.475 68.25,21.475 ; 68.325,38.7 F1.2@69.325,38.7 ; v2(68.325,39.075) 68.325,21.55 68.25,21.475 ; v2@72.3,13.3 v2(72.3,13.4) 72.3,21.475 ; C34.2@73.854,22.491 73.854,21.679 73.65,21.475 72.3,21.475 ; 68.25,21.475 72.3,21.475
50MHZ: U1.L11 XTAL1.3 | length 1.9
  Top Layer w0.254: U1.L11@35.7,27.15 XTAL1.3@35.7,29.049
AD0: U1.B2 U3.J6 U4.B6 | length 32.6
  Top Layer w0.127: U4.B6@10.975,22.8 11.35,22.425 v1(11.35,22.3) ; v1(11.6,17.45) v1(22.225,17.45) 27.9,17.45 28.076,17.626 28.076,20.833 28.226,20.983 29.533,20.983 U1.B2@29.85,21.3 ; U3.J6@21.075,21.55 v1(22.225,21.55)
  MidLayer1 w0.127: v1(11.35,22.3) 11.35,17.7 v1(11.6,17.45) ; v1(22.225,17.45) v1(22.225,21.55)
AD1: U1.A2 U3.H6 U4.C5 | length 33.6
  Top Layer w0.127: U4.C5@10.225,23.55 v1(10.6,23.175) ; v1(10.85,17.85) v1(22.625,17.85) 27.6,17.85 27.822,18.072 27.822,21.033 28.089,21.3 U1.A2@29.2,21.3 ; U3.H6@21.075,22.35 v1(22.625,22.35)
  MidLayer1 w0.127: v1(10.6,23.175) 10.617,23.158 10.617,18.083 v1(10.85,17.85) ; v1@22.575,22.35 v1@22.617,22.308 ; v1(22.625,17.85) v1(22.625,22.35)
AD2: U1.A3 U3.H5 U4.C6 | length 34.3
  Top Layer w0.127: v1(10.225,18.25) v1(23.025,18.25) 27.375,18.25 27.568,18.443 27.568,21.818 27.7,21.95 U1.A3@29.2,21.95 ; v1(10.225,22.3) U4.C6@10.225,22.8 ; U3.H5@20.275,22.35 v1(20.675,22.75)
  MidLayer1 w0.127: v1(10.225,22.3) 10.242,22.283 v1@10.242,18.25 ; v1(20.675,22.75) 22.825,22.75 23.025,22.55 v1(23.025,18.25)
AD3: U1.B3 U3.G6 U4.D5 | length 35.4
  Top Layer w0.127: U4.D5@9.475,23.55 v1(9.85,23.175) ; v1(9.85,18.65) v1(23.425,18.65) 27.1,18.65 27.314,18.864 27.314,22.083 27.514,22.283 29.517,22.283 U1.B3@29.85,21.95 ; U3.G6@21.075,23.15 v1(23.425,23.15)
  MidLayer1 w0.127: v1@9.833,18.65 9.833,23.158 v1(9.85,23.175) ; v1(23.425,18.65) v1(23.425,23.15)
AD4: U1.C3 U3.G5 U4.E5 | length 37.4
  Top Layer w0.127: U4.E5@8.725,23.55 v1(9.1,23.175) ; v1(9.35,19.05) v1@23.625,19.05 ; U3.G5@20.275,23.15 v1(20.675,23.55) ; v1(30.175,22.275) U1.C3@30.5,21.95
  MidLayer1 w0.127: v1(9.1,23.175) 9.2,23.075 9.2,19.2 v1(9.35,19.05) ; v1(20.675,23.55) 23.6,23.55 23.825,23.325 v1@23.825,19.058 ; v1@23.833,19.058 26.883,19.058 27.064,19.239 27.064,22.383 27.289,22.608 29.842,22.608 v1(30.175,22.275)
  other v1: 23.825,19.05
AD5: U1.C6 U3.F6 U4.F5 | length 37.9
  Top Layer w0.127: U4.F5@7.975,23.55 8.35,23.175 v1(8.35,22.3) ; v1(8.6,19.45) v1(24.225,19.45) 26.65,19.45 26.847,19.647 26.847,23.358 27.072,23.583 30.183,23.583 U1.C6@30.5,23.9 ; U3.F6@21.075,23.95 v1(24.225,23.95)
  MidLayer1 w0.127: v1(8.35,22.3) 8.35,19.7 v1(8.6,19.45) ; v1(24.225,19.45) v1(24.225,23.95)
AD6: U1.D6 U3.F5 U4.F6 | length 39.6
  Top Layer w0.127: v1@7.6,22.3 v1(7.625,22.3) 7.625,22.45 U4.F6@7.975,22.8 ; v1(7.875,19.85) v1(24.625,19.85) 26.375,19.85 26.593,20.068 26.593,24.033 26.793,24.233 30.817,24.233 U1.D6@31.15,23.9 ; U3.F5@20.275,23.95 v1(20.675,24.35)
  MidLayer1 w0.127: v1(7.625,22.3) 7.625,20.1 v1(7.875,19.85) ; v1(20.675,24.35) 24.38,24.35 24.625,24.105 v1(24.625,19.85)
AD7: U1.A7 U3.E6 U4.G6 | length 37.1
  Top Layer w0.127: U4.G6@7.225,22.8 7.225,20.325 7.3,20.25 v1(25.025,20.25) 26.15,20.25 26.339,20.439 26.339,24.458 26.431,24.55 U1.A7@29.2,24.55 ; U3.E6@21.075,24.75 v1(25.025,24.75)
  MidLayer1 w0.127: v1(25.025,20.25) v1(25.025,24.75)
AD8: U1.B7 U3.E5 U4.B1 | length 36.5
  Top Layer w0.127: U4.B1@10.975,26.55 v1(10.975,27.1) ; v1(11.275,29.833) v1(25.025,29.833) 25.717,29.833 25.764,29.786 25.764,26.719 25.758,26.712 25.758,25.117 25.992,24.883 29.517,24.883 U1.B7@29.85,24.55 ; U3.E5@20.275,24.75 v1(20.675,25.15)
  MidLayer1 w0.127: v1(10.975,27.1) 10.975,29.75 11.058,29.833 v1(11.275,29.833) ; v1(20.675,25.15) 20.683,25.158 24.787,25.158 25.017,25.388 v1@25.017,29.825 ; v1@25.017,29.833 v1@25.017,29.825 ; v1(25.025,29.833) v1@25.017,29.825
AD9: U1.C7 U3.D6 U4.C1 | length 37.3
  Top Layer w0.127: U4.C1@10.225,26.55 v1(10.225,27.1) ; v1(10.475,30.25) v1(24.625,30.25) 25.975,30.25 26.15,30.075 v1(26.15,25.975) ; U3.D6@21.075,25.55 v1(24.625,25.55) ; v1(30.175,24.875) U1.C7@30.5,24.55
  MidLayer1 w0.127: v1(10.225,27.1) 10.225,30 v1(10.475,30.25) ; v1(24.625,25.55) v1(24.625,30.25) ; v1(26.15,25.975) 26.15,25.175 26.267,25.058 29.992,25.058 v1(30.175,24.875)
AD10: U1.D7 U3.D5 U4.C2 | length 39.8
  Top Layer w0.127: v1(9.85,26.175) U4.C2@10.225,25.8 ; v1(10.1,30.642) v1(24.225,30.642) 25.983,30.642 26.542,30.083 26.542,26.585 v1(26.552,26.575) ; U3.D5@20.275,25.55 v1(20.675,25.95) ; v1(30.825,24.875) U1.D7@31.15,24.55
  MidLayer1 w0.127: v1(9.85,26.175) 9.833,26.192 9.833,30.375 v1(10.1,30.642) ; v1(20.675,25.95) 24.05,25.95 24.225,26.125 v1(24.225,30.642) ; v1(26.552,26.575) 26.552,25.998 27.167,25.383 30.317,25.383 v1(30.825,24.875)
AD11: U1.A8 U3.C6 U4.D2 | length 37.9
  Top Layer w0.127: v1(9.1,26.175) U4.D2@9.475,25.8 ; v1@9.35,31.034 v1(23.825,31.034) 26.091,31.034 26.946,30.179 26.946,25.554 27.3,25.2 U1.A8@29.2,25.2 ; U3.C6@21.075,26.35 v1(23.825,26.35)
  MidLayer1 w0.127: v1(9.1,26.175) 9.175,26.25 9.175,30.85 v1(9.35,31.025) ; v1(23.825,26.35) v1(23.825,31.034)
AD12: U1.C8 U3.C5 U4.E2 | length 40.9
  Top Layer w0.127: v1(8.35,26.175) U4.E2@8.725,25.8 ; v1(8.6,31.45) v1(23.425,31.45) 26.15,31.45 27.2,30.4 27.2,25.872 27.539,25.533 30.167,25.533 U1.C8@30.5,25.2 ; U3.C5@20.275,26.35 v1(20.675,26.75)
  MidLayer1 w0.127: v1(8.35,26.175) 8.367,26.192 8.367,31.217 v1(8.6,31.45) ; v1(20.675,26.75) 23.225,26.75 23.425,26.95 v1(23.425,31.45)
AD13: U1.D8 U3.B6 U4.F2 | length 41.7
  Top Layer w0.127: v1(7.6,26.175) U4.F2@7.975,25.8 ; v1(7.6,31.45) 8,31.85 v1(23.025,31.85) 26.275,31.85 27.6,30.525 v1(27.6,26.075) ; U3.B6@21.075,27.15 v1(23.025,27.15) ; v1(30.825,25.525) U1.D8@31.15,25.2
  MidLayer1 w0.127: v1(7.6,26.175) 7.583,26.192 7.583,31.433 v1(7.6,31.45) ; v1(23.025,27.15) v1(23.025,31.85) ; v1(27.6,26.075) 27.6,25.847 27.739,25.708 30.642,25.708 v1(30.825,25.525)
AD14: U1.B9 U3.B5 U4.F1 | length 39.7
  Top Layer w0.127: U4.F1@7.975,26.55 v1(7.975,27.1) ; v1(8.25,32.25) v1(22.625,32.25) 26.4,32.25 27.854,30.796 27.854,26.446 28.117,26.183 29.517,26.183 U1.B9@29.85,25.85 ; U3.B5@20.275,27.15 v1(20.675,27.55)
  MidLayer1 w0.127: v1(7.975,27.1) 7.992,27.117 7.992,32.067 v1@8.175,32.25 ; v1(20.675,27.55) 22.475,27.55 22.625,27.7 v1(22.625,32.25)
AD15: U1.D9 U3.A6 U4.G1 | length 40.9
  Top Layer w0.127: U4.G1@7.225,26.55 v1@7.225,27.05 ; v1@7.425,32.65 v1(22.225,32.65) 26.6,32.65 28.25,31 v1(28.25,26.883) ; U3.A6@21.075,27.95 v1(22.225,27.95) ; v1(30.825,26.175) U1.D9@31.15,25.85
  MidLayer1 w0.127: v1(7.175,27.1) 7.175,32.375 v1(7.425,32.625) ; v1(22.225,27.95) v1(22.225,32.65) ; v1(28.25,26.883) 28.4,26.733 30.267,26.733 v1(30.825,26.175)
AD16: U1.E9 U4.F4 | length 43.3
  Top Layer w0.127: v1(4.375,26.075) 3.729,26.721 3.729,29.61 7.168,33.05 26.75,33.05 28.675,31.125 v1(28.675,27.475) ; v1(7.6,23.925) U4.F4@7.975,24.3 ; v1(31.475,26.175) U1.E9@31.8,25.85
  MidLayer1 w0.127: v1(4.375,26.075) 6.579,23.871 7.546,23.871 v1(7.6,23.925) ; v1(28.675,27.475) 28.675,27.108 28.75,27.033 30.617,27.033 v1(31.475,26.175)
AD17: U1.B10 U4.E4 | length 43.3
  Top Layer w0.127: v1(4.375,25.5) 3.475,26.4 3.475,29.716 7.209,33.45 27.075,33.45 29.525,31 29.525,26.825 U1.B10@29.85,26.5 ; v1(8.35,23.925) U4.E4@8.725,24.3
  MidLayer1 w0.127: v1(4.375,25.5) 6.342,23.533 7.958,23.533 v1(8.35,23.925)
AD18: U1.C10 U4.D3 | length 46.7
  Top Layer w0.127: v1(4.375,24.926) 3.221,26.08 3.221,29.821 7.242,33.842 27.308,33.842 30.175,30.975 30.175,26.825 U1.C10@30.5,26.5 ; v1(9.1,24.675) U4.D3@9.475,25.05
  MidLayer1 w0.127: v1(4.375,24.926) 6.022,23.279 8.379,23.279 9.1,24 v1(9.1,24.675)
AD19: U1.D10 U4.H1 | length 38
  Top Layer w0.127: U4.H1@6.475,26.55 v1(6.475,27.1) ; v1(6.725,34.25) 27.625,34.25 30.825,31.05 30.825,26.825 U1.D10@31.15,26.5
  MidLayer1 w0.127: v1(6.475,27.1) 6.475,34 v1(6.725,34.25) v1@6.85,34.25
AD20: U1.E10 U4.G2 | length 41.5
  Top Layer w0.127: v1@5.925,27.125 v1(5.925,27.1) 5.925,26.35 6.1,26.175 6.85,26.175 U4.G2@7.225,25.8 ; v1(6.175,34.65) 28.075,34.65 31.464,31.261 31.464,27.284 31.466,27.282 31.466,26.834 U1.E10@31.8,26.5
  MidLayer1 w0.127: v1(5.925,27.1) 5.925,34.4 v1(6.175,34.65)
ADC0_DM0: P1.11 U1.K2 | length 40.3
  Top Layer w0.127: U1.K2@35.05,21.3 35.375,20.975 35.375,8.725 35.516,8.584 55.791,8.584 56.85,7.525 56.85,3.79 P1.11@55.545,2.485
ADC0_DM1: P1.3 U1.H2 | length 31.2
  Top Layer w0.127: U1.H2@33.75,21.3 34.075,20.975 34.075,7.675 34.225,7.525 45.275,7.525 46.65,6.15 46.65,3.75 P1.3@45.385,2.485
ADC0_DP0: P1.9 U1.K1 | length 37.3
  Top Layer w0.127: U1.K1@35.05,20.65 35.05,8.425 35.145,8.33 53.27,8.33 54.275,7.325 54.275,3.755 P1.9@53.005,2.485
ADC0_DP1: P1.1 U1.H1 | length 28.4
  Top Layer w0.127: U1.H1@33.75,20.65 33.75,7.425 33.904,7.271 43.129,7.271 44.125,6.275 44.125,3.765 P1.1@42.845,2.485
ADC0XX: P1.14 U1.H3 | length 40.8
  Top Layer w0.127: U1.H3@33.75,21.95 v1(34.075,21.625)
  MidLayer1 w0.127: v1(34.075,21.625) 34.075,10.85 34.275,10.65 v1(57.85,10.65)
  Bottom Layer w0.127: v1(57.85,10.65) 58.085,10.415 P1.14@58.085,5.025
ADC1_DM0: P1.15 U1.L2 | length 44.6
  Top Layer w0.127: U1.L2@35.7,21.3 36.15,20.85 36.15,9.2 36.258,9.092 60.933,9.092 61.9,8.125 61.9,3.76 P1.15@60.625,2.485
ADC1_DM1: P1.7 U1.J2 | length 35.8
  Top Layer w0.127: U1.J2@34.4,21.3 34.725,20.975 34.725,8.25 34.899,8.076 50.699,8.076 51.775,7 51.775,3.795 P1.7@50.465,2.485
ADC1_DP0: P1.13 U1.L1 | length 41.8
  Top Layer w0.127: U1.L1@35.7,20.65 35.7,9.1 35.962,8.838 58.762,8.838 59.35,8.25 59.35,3.75 P1.13@58.085,2.485
ADC1_DP1: P1.5 U1.J1 | length 32.8
  Top Layer w0.127: U1.J1@34.4,20.65 34.4,7.975 34.553,7.822 48.153,7.822 49.225,6.75 49.225,3.785 P1.5@47.925,2.485
ADC1XX: P1.16 U1.J3 | length 42.5
  Top Layer w0.127: U1.J3@34.4,21.95 v1(34.725,21.625)
  MidLayer1 w0.127: v1(34.725,21.625) 34.725,11.25 34.925,11.05 v1(60.112,11.05)
  Bottom Layer w0.127: v1(60.112,11.05) 60.625,10.537 P1.16@60.625,5.025
ADDR0: U3.J1
ADDR1: U3.H1 U4.A3 | length 11
  Top Layer w0.127: U4.A3@11.725,25.05 12.825,25.05 12.946,24.929 12.946,20.829 13.017,20.758 15.783,20.758 15.908,20.883 15.908,22.183 16.075,22.35 U3.H1@17.075,22.35
ADDR2: U3.H2 U4.A4 | length 11.2
  Top Layer w0.127: U4.A4@11.725,24.3 12.3,24.3 12.675,23.925 12.675,20.6 12.771,20.504 16.079,20.504 16.3,20.725 v1(16.3,21.95) ; v1(17.475,21.95) U3.H2@17.875,22.35
  MidLayer1 w0.127: v1(16.3,21.95) v1(17.475,21.95)
ADDR3: U3.G1 U4.A5 | length 9.3
  Top Layer w0.127: U4.A5@11.725,23.55 v1(12.275,23.55) ; v1(13.6,23.15) 13.6,21.35 13.684,21.266 15.291,21.266 15.4,21.375 15.4,22.59 15.4,23.075 15.475,23.15 U3.G1@17.075,23.15
  MidLayer1 w0.127: v1(12.275,23.55) 13.5,23.55 13.6,23.45 v1(13.6,23.15)
ADDR4: U3.G2 U4.B3 | length 13
  Top Layer w0.127: U4.B3@10.975,25.05 11.35,25.425 12.925,25.425 13.2,25.15 13.2,21.1 13.288,21.012 15.566,21.012 15.654,21.1 15.654,22.484 15.92,22.75 v1(16.3,22.75) v1@16.292,22.758 ; v1(17.475,22.75) U3.G2@17.875,23.15
  MidLayer1 w0.127: v1(16.3,22.75) v1(17.475,22.75)
ADDR5: U3.F1 U4.B4 | length 11.1
  Top Layer w0.127: U4.B4@10.975,24.3 v1(11.35,23.925) ; v1(13.6,23.95) 13.925,23.95 13.996,23.879 13.996,21.629 14.105,21.52 15.066,21.52 15.146,21.6 15.146,23.184 15.15,23.188 15.15,23.825 15.275,23.95 U3.F1@17.075,23.95
  MidLayer1 w0.127: v1(11.35,23.925) 11.375,23.95 v1@13.775,23.95